# Altium PCB Emitter.PcbDoc
Units mm, origin at the board's own origin, x right, y up, seen from the top; angles counter-clockwise.
Board outline 35.56 x 22.86 mm, 2 copper layers (Top Layer, Bottom Layer), stack 1.58 mm thick; 41 components, 23 nets, 112 pads, 20 vias.
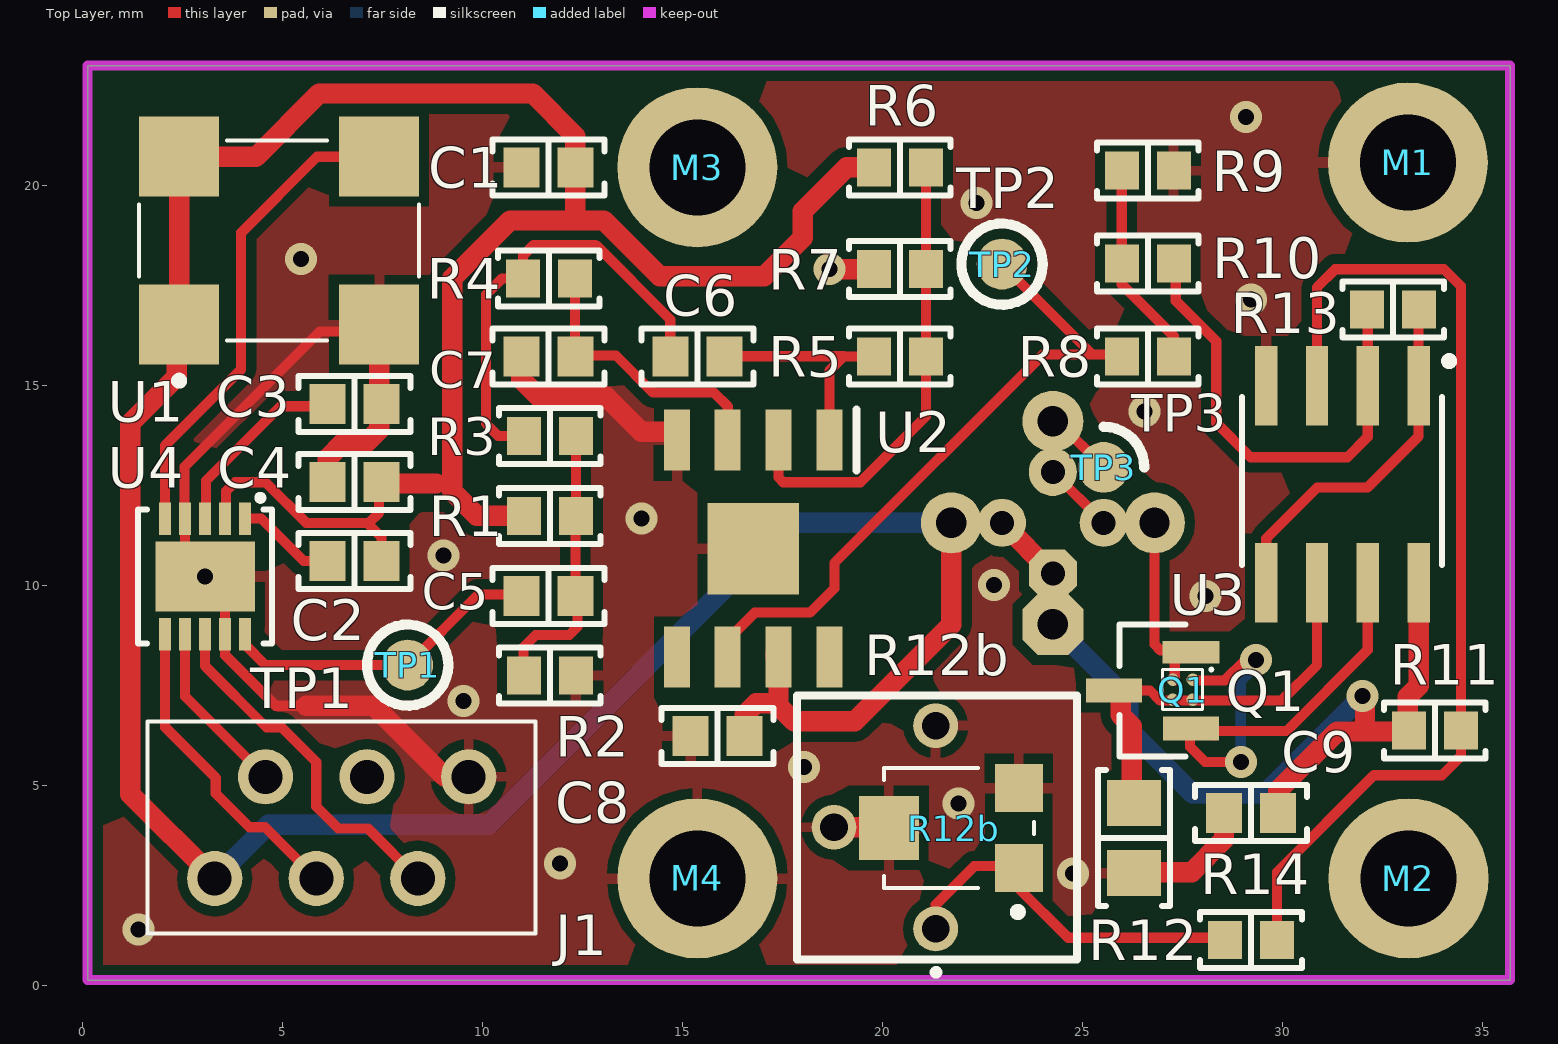
[diagram p0: Top Layer view]
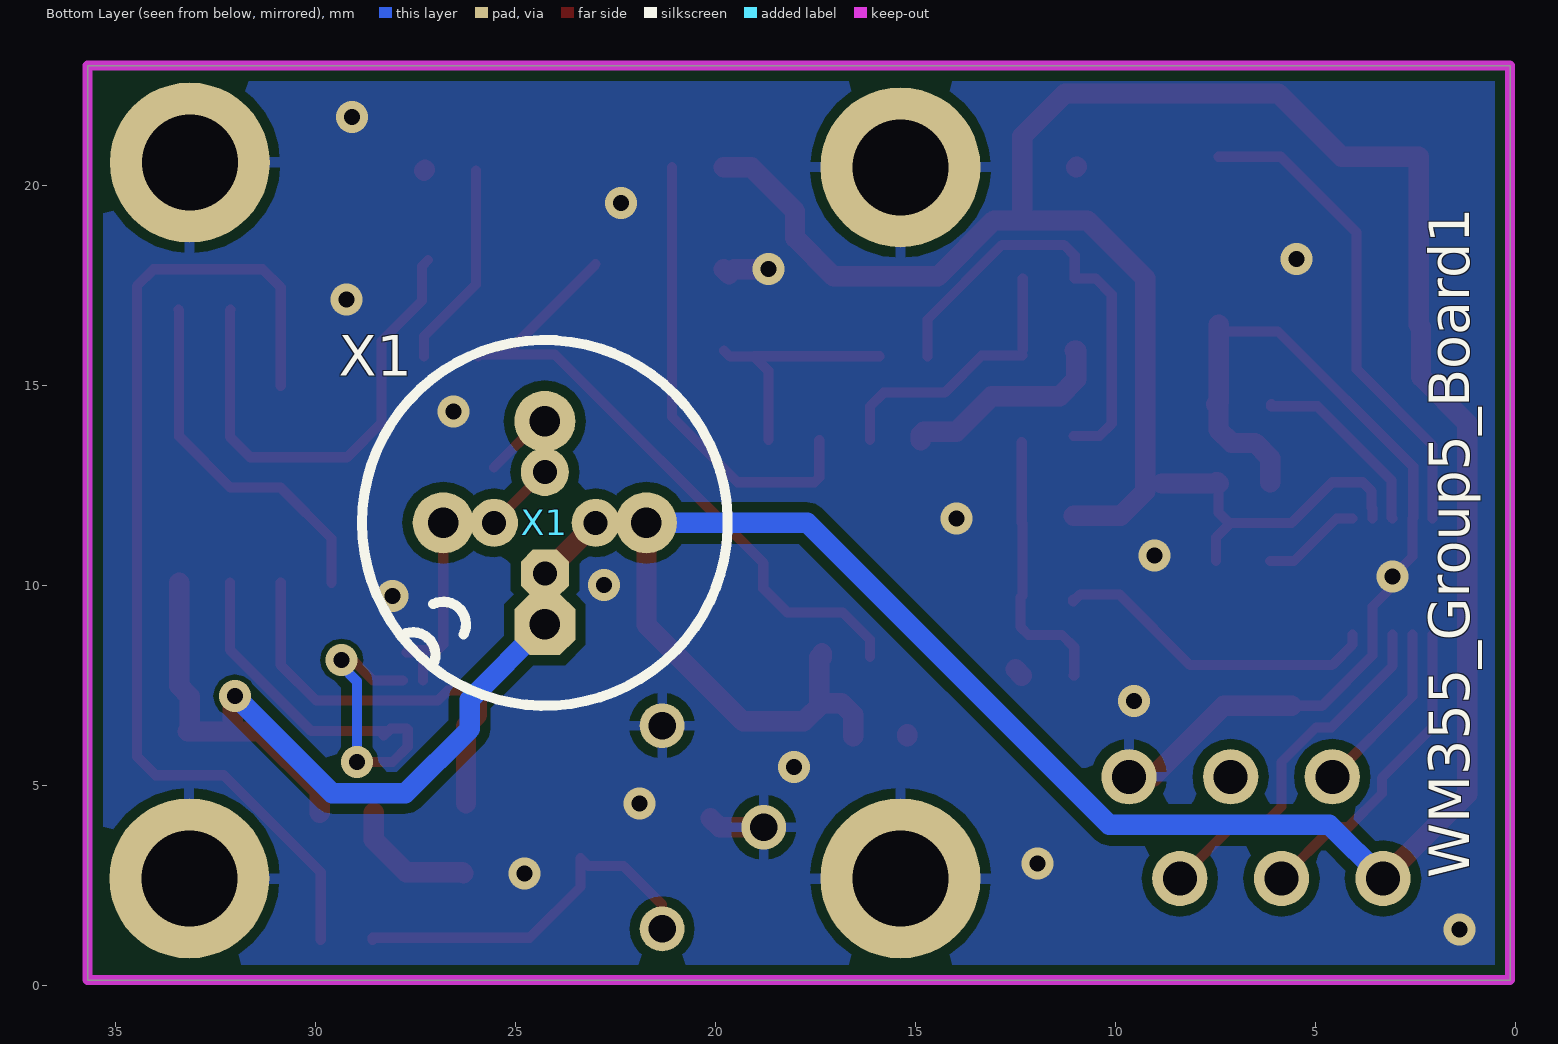
[diagram p1: Bottom Layer view, seen from below]
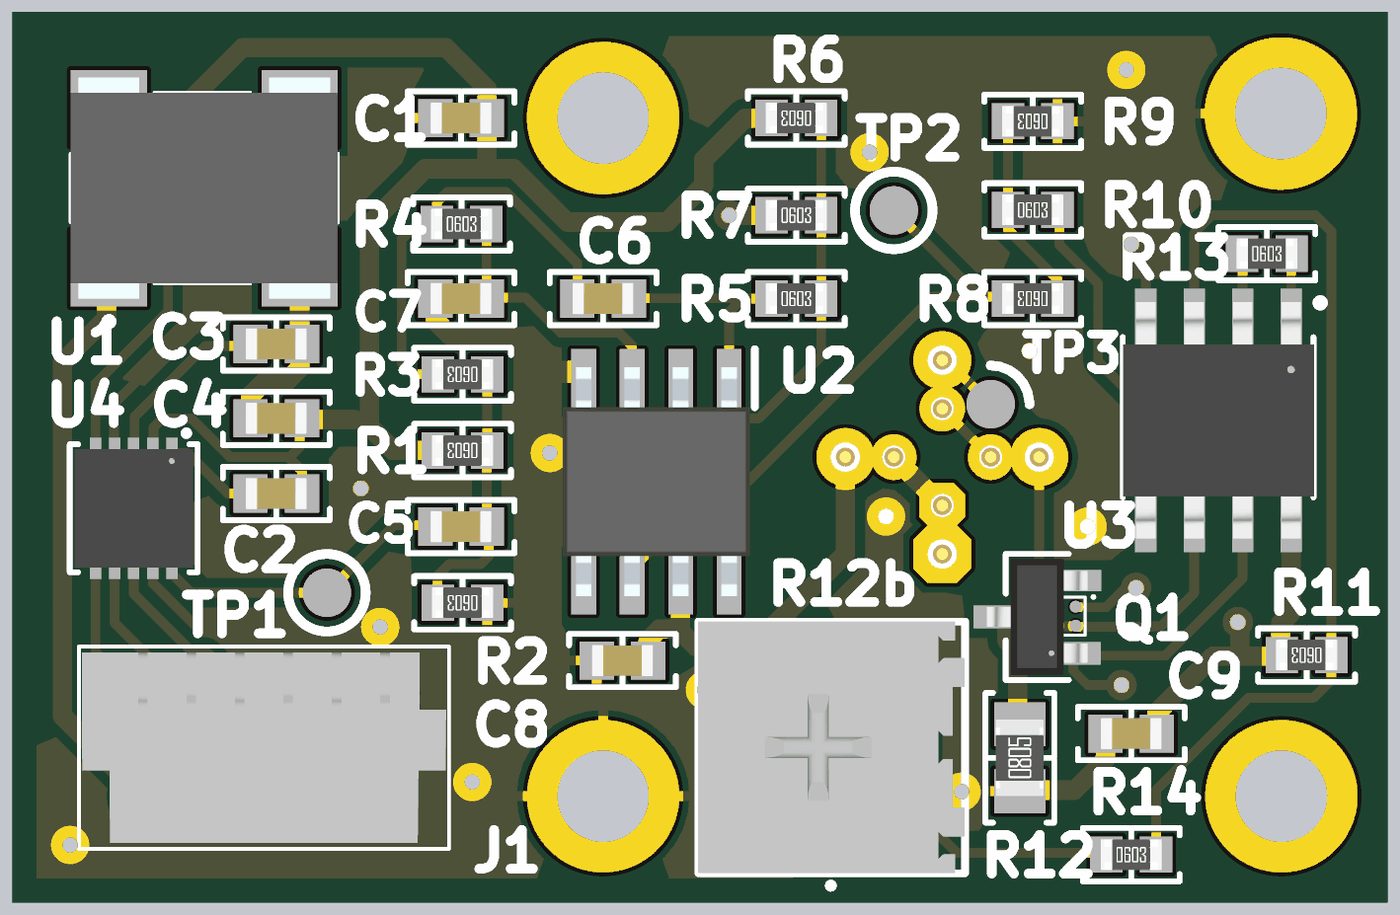
[diagram p2: 3D render of the assembled board from above, using the file's embedded part models]

## Layer stack, top to bottom
Top Solder: solder mask 0.0102, Solder Resist, Dk 3.5
Top Layer: signal copper 0.0356
Dielectric 1: dielectric 1.509, FR-4, Dk 4.8
Bottom Layer: signal copper 0.0356
Bottom Solder: solder mask 0.0102, Solder Resist, Dk 3.5

## Board outline
35.687,22.987 35.687,0.127 0.127,0.127 0.127,22.987

## Design rules (kind name [scope] priority, off if disabled: settings)
Clearance [All] p1: gap=0.127 ignorepadtopadclearanceinfootprint=FALSE except(0.254: Arc-Fill Arc-Poly Arc-Region Track-Fill Track-Poly Track-Region SMDPad-Fill SMDPad-Poly SMDPad-Region THPad-Fill THPad-Poly THPad-Region)
MinimumSolderMaskSliver [All] p1: minsoldermaskwidth=0.064
PolygonConnect PolygonConnect_1 [IsVia AND InNet('GND')] p1: connectstyle=Direct reliefconductorwidth=0.254 reliefentries=4 polygonreliefangle="90 Angle" airgapwidth=0.254
PolygonConnect [All] p2: connectstyle=Relief reliefconductorwidth=0.254 reliefentries=4 polygonreliefangle="90 Angle" airgapwidth=0.254
RoutingVias [All] p1: holewidth=0.711 width=1.27 viastyle="Through Hole" minholewidth=0.711 minwidth=1.27 maxholewidth=0.711 maxwidth=1.27
SilkToSilkClearance [All] p1: silktosilkclearance=0.003
SilkToSolderMaskClearance [IsPad] p1: minsilkscreentomaskgap=0.051 clearancetoexposedcopper=TRUE
SolderMaskExpansion [All] p1: expansion=0.102 istentingtop=FALSE
Width Width_3 [InNet('VCC')] p1: maxlimit=0.508 minlimit=0.254 preferedwidth=0.508
Width Width_2 [InNet('+3.3V')] p2: maxlimit=0.508 minlimit=0.254 preferedwidth=0.508
Width Width_1 [InNet('GND')] p3: maxlimit=0.508 minlimit=0.254 preferedwidth=0.508
Width [All] p4: maxlimit=0.508 minlimit=0.254 preferedwidth=0.254
27 further rules are at their usual default settings.

## Classes and differential pairs
component class Emitter: C1 C2 C3 C4 C5 C6 C7 C8 C9 J1 M1 M2 M3 M4 Q1 R1 R2 R3 R4 R5 R6 R7 R8 R9 R10 R11 R12 R12b R13 R14 TP1 TP2 TP3 U1 U2 U3 U4 X1

## Components (designator, comment, footprint, x,y, rotation, side; value= is the part's Value field where it differs from the comment)
C1 "100nF" "CAP 0603_1608" 11.644,20.447 r0 top
C2 "10nF" "CAP 0603_1608" 6.8,10.602 r0 top
C3 "100nF" "CAP 0603_1608" 6.8,14.523 r180 top
C4 "100nF" "CAP 0603_1608" 6.8,12.573 r0 top
C5 "18pF" "CAP 0603_1608" 11.644,9.735 r0 top
C6 "18pF" "CAP 0603_1608" 15.367,15.714 r0 top
C7 "18pF" "CAP 0603_1608" 11.644,15.714 r0 top
C8 "100nF" "CAP 0603_1608" 15.875,6.223 r0 top
C9 "100nF" "CAP 0603_1608" 29.21,4.309 r0 top
J1 "7-215460-6" 72154606 6.477,3.937 r0 top
M1 "PTH" M2-PTH 33.132,20.565 r180 top
M2 "PTH" M2-PTH 33.147,2.667 r180 top
M3 "PTH" M2-PTH 15.367,20.447 r180 top
M4 "PTH" M2-PTH 15.367,2.667 r180 top
Q1 "Si8472DB-T2-E1" SI8472DB 27.504,7.387 r270 top
Q1 "CPH3456" CPH3456 26.801,7.437 r90 top
R1 "10k" "RES 0603_1608" 11.684,11.731 r180 top
R2 "10k" "RES 0603_1608" 11.684,7.738 r180 top
R3 "1k8" "RES 0603_1608" 11.684,13.727 r180 top
R4 "2.55k" "RES 0603_1608" 11.659,17.67 r0 top
R5 "787R" "RES 0603_1608" 20.432,15.714 r0 top
R6 "1k8" "RES 0603_1608" 20.432,20.447 r180 top
R7 "1k8" "RES 0603_1608" 20.432,17.898 r0 top
R8 "2k" "RES 0603_1608" 26.63,15.714 r180 top
R9 "100k" "RES 0603_1608" 26.63,20.362 r180 top
R10 "51k" "RES 0603_1608" 26.63,18.038 r0 top
R11 "16k" "RES 0603_1608" 33.807,6.367 r180 top
R12 "4.7k" "RES 0603_1608" 29.21,1.134 r0 top
R12b "3362P-1-103LF" 3362P_1 24.856,3.947 r90 top
R12b "TC33X-1-103E" TC33X2201E 21.78,3.928 r90 top
R13 "43k" "RES 0603_1608" 32.766,16.891 r0 top
R14 "4.7R" "RES 0805_2012" 26.289,3.674 r90 top
TP1 "Generated waveform" TP-SMD-50mil 8.128,8.001 r90 top
TP2 "Op-amp output" TP-SMD-50mil 22.987,18.025 r90 top
TP3 "Signal out" TP-SMD-50mil 25.527,12.945 r90 top
U1 "XO91050UITA" XO91050UITA24576 4.913,18.61 r0 top
U2 "AD8045ARDZ_1" SOIC127P600X175-9N 16.764,10.913 r270 top
U3 "AD8529ARZ" AD8529ARZ 31.164,12.601 r270 top
U4 "AD9837ACPZ-RL7" AD9837ACPZ-RL7 1.124,12.017 r270 top
X1 "TF-184" TF-184 24.257,11.557 r0 bottom
X1 "TF-54" TF-54 24.258,11.557 r0 bottom

## Footprints (in the part's own frame and the unit in brackets; to place one, negate y for a bottom-side part, rotate by r counter-clockwise, add the part's x,y. Pads: shape width x height; smd on the part's side, far side on the other; paste and mask are expansions set on the pad)
3362P_1 [mm]
  round 1.12 hole 0.69: 1(-2.54,3.53) 2(0,6.07) 3(2.54,3.53)
  silkscreen extent -3.68,0 3.3,6.99, body extent -3.3,0.01 3.3,7, height 4.65
72154606 [mm]
  round 1.381 hole 0.85: 1(-3.175,-1.27) 2(-1.905,1.27) 3(-0.635,-1.27) 4(0.635,1.27) 5(1.905,-1.27) 6(3.175,1.27)
  silkscreen extent -4.85,-2.65 4.85,2.65, body extent -4.77,-2.5 4.77,2.5, height 5.7
AD8529ARZ [mil] "Op-amp"
  rect 78x22 smd paste+0 mask+0: 1(-93.89,88.07) 2(-93.89,38.07) 3(-93.89,-11.93) 4(-93.89,-61.93) 5(100.11,-61.93) 6(100.11,-11.93) 7(100.11,38.07) 8(100.11,88.07)
  silkscreen extent -122,-86 83,122, body extent -119,-85 125,112, height 69
AD9837ACPZ-RL7 [mm]
  rect 0.813x0.3 smd paste+0 mask+0: 1(0.352,2.94) 2(0.352,2.44) 3(0.352,1.94) 4(0.352,1.44) 5(0.352,0.94) 6(3.248,0.94) 7(3.248,1.44) 8(3.248,1.94) 9(3.248,2.44) 10(3.248,2.94)
  rect 1.753x2.489 smd paste+0 mask+0: 11(1.8,1.94)
  silkscreen extent -0.24,0.26 3.48,3.62, body extent 0.25,0.39 3.35,3.49, height 0.79
"CAP 0603_1608" [mm] "Chip Capacitor, 2-Leads, Body 1.60x0.80mm, IPC Medium Density"
  rect 0.9x1 smd: 1(-0.675,0) 2(0.675,0)
  silkscreen extent -1.4,-0.7 1.4,0.7, body extent -0.8,-0.41 0.8,0.41, height 0.82
CPH3456 [mm]
  rect 0.6x1.4 smd paste+0 mask+0: 1(-1.024,-0.91) 3(-0.071,1.02)
  rect 0.559x1.422 smd paste+0 mask+0: 2(0.881,-0.91)
  silkscreen extent -1.72,-0.77 1.58,0.88, body extent -1.6,-1.27 1.45,1.38, height 1.12
M2-PTH [mm] "M2 Mounting Hole (Plated, Exposed Pad)"
  round 4 hole 2.4: 1(0,0)
"RES 0603_1608" [mm] "Chip Resistor, 2-Leads, Body 1.60x0.80mm, IPC Medium Density"
  rect 0.85x0.95 smd: 1(-0.65,0) 2(0.65,0)
  silkscreen extent -1.27,-0.7 1.27,0.7, body extent -0.8,-0.4 0.8,0.4, height 0.45
"RES 0805_2012" [mm] "Chip Resistor, 2-Leads, Body 2.00x1.25mm, IPC Medium Density"
  rect 1.15x1.35 smd: 1(-0.875,0) 2(0.875,0)
  silkscreen extent -1.7,-0.9 1.7,0.9, body extent -1,-0.62 1,0.63, height 0.6
SI8472DB [mm] "N channel MOSFET"
  round 0.31 smd mask+0.05: 1(-0.25,0.25) 2(-0.25,-0.25) 3(0.25,0.25) 3(0.25,-0.25)
  silkscreen extent -0.54,-0.5 0.5,0.75
SOIC127P600X175-9N [mm]
  rect 1.525x0.65 smd: 1(-2.712,1.905) 2(-2.712,0.635) 3(-2.712,-0.635) 4(-2.712,-1.905) 5(2.712,-1.905) 6(2.712,-0.635) 7(2.712,0.635) 8(2.712,1.905)
  rect 2.29x2.29 smd: 9(0,0)
  silkscreen extent -3.47,2.58 -1.95,2.58, body extent -3,-2.45 3,2.45, height 1.75
TC33X2201E [mm]
  rect 1.2x1.2 smd: 1(-1,-1.625) 3(1,-1.625)
  rect 1.6x1.5 smd: 2(0,1.625)
  silkscreen extent -2.2,-2 1.5,1.75, body extent -1.5,-1.9 1.5,1.9, height 1.2
TF-54 [mil] "TF-54 IC socket from Fischer Elektronik"
  oct 60x60 hole 30: 1(0,100)
  round 60 hole 30: 2(100,0) 3(0,-100) 4(-100,0)
  silkscreen extent -180,-180 180,180, body extent -203,-203 203,203, height 295
TF-184 [mm] "TF-184 IC socket from Fischer Elektronik"
  oct 1.2x1.2 hole 0.6: 1(0,1.27)
  round 1.2 hole 0.6: 2(1.27,0) 3(0,-1.27) 4(-1.27,0)
  silkscreen extent 1.97,1.97 2.79,2.79, body extent -3.65,-3.65 3.65,3.65, height 7.5
TP-SMD-50mil [mm] "50 mil diameter SMD test point"
  round 1.27 smd: 1(0,0)
  silkscreen extent -1.02,-1.02 1.02,1.01
XO91050UITA24576 [mm]
  rect 2x2 smd: 1(-2.5,-2.1) 2(2.5,-2.1) 3(2.5,2.1) 4(-2.5,2.1)
  silkscreen extent -3.5,-3.6 3.5,2.5, body extent -3.5,-2.9 3.5,2.9, height 1.1

## Part data
C1 C2 C3 C4 C5 C6 C7 C8 C9: library part Capacitor, "SMT Capacitor"
J1: "Micro-Match Connector Female 6-Way", Manufacturer_Name="TE Connectivity", Mouser Part Number=571-7-215460-6, Arrow Part Number=7-215460-6, Arrow Price/Stock=https://www.arrow.com/en/products/7-215460-6/te-connectivity, Datasheet Link=https://www.te.com/commerce/DocumentDelivery/DDEController?Action=srchrtrv&DocNm=4-1773457-1_050_Micro_MaTch&DocType=Data+Sheet&DocLang=English&PartCntxt=7-215460-6&DocFormat=pdf, Height=6mm, Manufacturer_Part_Number=7-215460-6, Mouser Price/Stock=https://www.mouser.co.uk/ProductDetail/TE-Connectivity/7-215460-6/?qs=XAKIUOoRPe4W4KMZv%2FpWzg%3D%3D, System=Connector
M1 M2 M3 M4: "Mounting Hole (Plated, Exposed Pad)"
Q1: library part SI8472DB-T2-E1, "N channel MOSFET"
Q1: "N channel MOSFET"
R1 R2 R3 R4 R5 R6 R7 R8 R9 R10 R11 R12 R13 R14: library part Resistor, "SMT Resistor"
R12b: "TH Trim Potentiometer", Arrow Part Number=TC33X-1-103E, Manufacturer_Name=Bourns, Mouser Part Number=652-TC33X-1-103E, Arrow Price/Stock=https://www.arrow.com/en/products/tc33x-1-103e/bourns?region=nac, Datasheet Link=https://www.bourns.com/pdfs/TC33.pdf, Manufacturer_Part_Number=TC33X-1-103E, Mouser Price/Stock=https://www.mouser.co.uk/ProductDetail/Bourns/TC33X-1-103E?qs=4vvWAaIu%2Fq5rtw%252Bjip48Mw%3D%3D
R12b: "SMD Trim Potentiometer", Manufacturer_Name=Bourns, Mouser Part Number=652-TC33X-1-103E, Arrow Part Number=TC33X-1-103E, Arrow Price/Stock=https://www.arrow.com/en/products/tc33x-1-103e/bourns?region=nac, Datasheet Link=https://www.bourns.com/pdfs/TC33.pdf, Manufacturer_Part_Number=TC33X-1-103E, Mouser Price/Stock=https://www.mouser.co.uk/ProductDetail/Bourns/TC33X-1-103E?qs=4vvWAaIu%2Fq5rtw%252Bjip48Mw%3D%3D
TP1 TP2 TP3: library part "Test Point"
U1: library part 16MHZ_XO91050UITA, "16 MHz SMD oscillator", Manufacturer_Name=EUROQUARTZ, Manufacturer_Part_Number="14.7456MHZ XO91050UITA", Datasheet Link=http://www.farnell.com/datasheets/75391.pdf, Height=1mm
U2: library part AD8045ARDZ, "High speed op-amp", Manufacturer_Name="Analog Devices", Mouser Part Number=584-AD8045ARDZ, Arrow Part Number=AD8045ARDZ, Arrow Price/Stock=https://www.arrow.com/en/products/ad8045ardz/analog-devices, Datasheet Link=https://datasheet.datasheetarchive.com/originals/distributors/Datasheets-SFU1/DSASFU10003709.pdf, Height=1.75mm, Manufacturer_Part_Number=AD8045ARDZ, Mouser Price/Stock=https://www.mouser.co.uk/ProductDetail/Analog-Devices/AD8045ARDZ?qs=%2FtpEQrCGXCwHFOdY8Jjrpw%3D%3D
U3: "Op-amp"
U4: "Programmable waveform generator"
X1: "TF-184 Socket from Fischer Elektronik"
X1: "TF-54 Socket from Fischer Elektronik"

## Via types
v1: diameter 0.8, hole 0.4, Top Layer to Bottom Layer, 12 vias
v2: diameter 0.8, hole 0.4, Top Layer to Bottom Layer, tented top, 8 vias

## Nets (pads, with @x,y where several pads share a name; then routed paths per layer and width w, separated by ;. In a path a pad name is that pad's centre, name@x,y a point inside that pad or via, vN(x,y) a via of type N, cw(c..) or ccw(c..) an arc to the next point about the centre after c; other vN are vias at no path point)
FSYNC: J1.5 U4.8 | length 9
  Top Layer w0.254: U4.8 3.064,7.976 4.597,6.443 4.978,6.443 5.842,5.579 5.842,4.466 6.388,3.92 7.129,3.92 J1.5
FVOUT: C5.1 TP1.1 U4.10 | length 8.3
  Top Layer w0.254: U4.10 4.064,8.512 4.575,8.001 TP1.1 9.897,9.77 10.872,9.77 11.049,9.593 C5.1@11.049,9.643
GND: C1.1 C3.1 C4.1 C7.1 C8.1 C9.1 J1.6 M1.1 M2.1 M3.1 M4.1 R2.1 R7.1 R9.1 R12b.2 R12b.3 R14.1 U1.2 U2.4 U2.9 U3.4 U4.4 U4.9 U4.11 | length 35.3
  Top Layer w0.254: 5.588,6.985 4.826,6.985 3.564,8.247 U4.9 3.564,9.467 3.064,9.967 v1(3.064,10.217) 2.564,10.717 U4.4 2.548,11.68 2.548,12.962 5.927,16.341 7.244,16.341 U1.2
  Top Layer w0.508: 5.588,6.985 7.281,6.985 9.059,5.207 J1.6 ; C4.1 6.125,13.177 6.502,13.555 7.087,13.555 7.417,13.885 7.417,14.465 C3.1 7.413,14.585 U1.2 ; C1.1@10.96,20.456 C1.1 ; C7.1@11.016,15.866 10.969,15.866 C7.1 10.969,15.142 11.388,14.723 13.081,14.723 13.97,13.834 14.788,13.834 14.859,13.763 U2.4 ; R2.1 R2.1@12.49,7.894 ; C8.1 C8.1@15.2,6.273 ; v2(18.669,17.898) 19.528,17.898 19.655,17.771 R7.1 ; R12b.2@18.786,3.947 19.89,3.947 R12b.2@20.118,4.175 ; R14.1 26.315,2.825 27.726,2.825 28.535,3.634 C9.1 ; R9.1@27.254,20.387 R9.1
  other v1: 1.397,1.388 24.765,2.785 11.938,3.039 21.895,4.538 18.034,5.452 9.525,7.103 28.067,9.735 22.784,9.999 13.97,11.664 22.352,19.549 29.083,21.708
  other v2: 9.017,10.735 26.543,14.342 29.21,17.136 5.461,18.152
NetC2_1: C2.1 U4.1 | length 2.5
  Top Layer w0.254: U4.1 4.465,11.664 5.527,10.602 C2.1
NetC3_2: C3.2 U4.3 | length 4.8
  Top Layer w0.254: U4.3 3.087,11.687 3.087,12.612 4.948,14.473 6.096,14.473 C3.2@6.096,14.523
NetC5_2: C5.2 R1.1 R2.2 R3.1 | length 6.9
  Top Layer w0.254: R2.2 11.024,7.749 11.024,8.449 11.328,8.754 12.167,8.754 12.37,8.957 12.37,9.684 C5.2 12.319,11.548 12.334,11.563 R3.1@12.334,13.58
NetC6_1: C6.1 R3.2 R4.1 | length 11.5
  Top Layer w0.254: R3.2 10.394,13.727 10.084,14.037 10.084,17.263 10.49,17.67 R4.1 11.009,18.239 11.278,18.508 12.827,18.508 14.692,16.643 C6.1
NetC6_2: C6.2 R5.1 U2.1 | length 6.2
  Top Layer w0.254: C6.2@15.897,15.721 19.032,15.721 ; U2.1 18.669,15.358 19.025,15.714 19.63,15.714 R5.1@19.782,15.866
NetC7_2: C7.2 R4.2 U2.3 | length 7
  Top Layer w0.254: R4.2 12.309,15.877 C7.2@12.319,15.866 ; C7.2@12.319,15.739 13.335,15.739 14.261,14.813 15.785,14.813 16.129,14.469 U2.3
NetQ1_1: Q1.1 U3.7 | length 13.5
  Top Layer w0.254: Q1.1@27.805,7.62 28.554,7.62 29.062,8.128 v2(29.337,8.128) ; Q1.1@28.284,6.241 Q1.1@28.175,6.35 ; v2(28.956,5.579) 28.067,5.579 27.686,5.96 27.686,6.388 27.711,6.414 28.111,6.414 Q1.1@28.175,6.35 ; U3.7 32.131,8.382 30.099,6.35 Q1.1@28.175,6.35
  Bottom Layer w0.254: v2(28.956,5.579) 28.956,7.599 29.337,7.98 v2(29.337,8.128)
NetQ1_2: Q1.2 TP3.1 X1.2 X1.3 | length 11.2
  Top Layer w0.254: X1.3@24.257,14.097 24.257,12.828 25.527,11.557 X1.2@26.798,11.557 ; X1.3@24.258,14.097 24.374,14.097 TP3.1 ; X1.2@26.797,11.556 26.797,8.522 26.946,8.373 27.657,8.373 27.711,8.319 27.33,8.319 27.305,8.293 Q1.2@27.305,7.62
NetQ1_3: Q1.3 R14.2 U3.6 | length 10.4
  Top Layer w0.254: Q1.3@25.781,7.366 26.686,7.366 26.94,7.112 Q1.3@27.305,7.112 ; R14.2@26.229,4.549 R14.2 ; Q1.3@27.305,7.12 Q1.3@27.805,7.12 ; Q1.3@27.805,7.112 29.758,7.112 29.766,7.12 29.98,7.12 30.861,8.001 U3.6
  Top Layer w0.508: Q1.3@25.954,7.193 25.954,6.752 26.229,6.477 R14.2@26.229,4.549
NetR5_2: R5.2 R6.1 R7.2 U2.2 | length 11.6
  Top Layer w0.254: U2.2 17.399,12.691 17.517,12.573 19.44,12.573 21.082,14.215 R5.2 R7.2 R6.1
NetR8_1: R8.1 R9.2 R10.1 | length 5.2
  Top Layer w0.254: R9.2 R10.1 25.98,17.522 27.28,16.222 R8.1
NetR8_2: R8.2 TP2.1 U2.6 | length 16.8
  Top Layer w0.254: U2.6 16.129,8.639 16.803,9.313 18.186,9.313 18.796,9.923 18.796,10.558 24.002,15.764 25.248,15.764 ; TP2.1 25.248,15.764 ; R8.2@25.929,15.714 25.929,15.764 25.248,15.764
NetR10_2: R10.2 R13.1 U3.2 | length 12.1
  Top Layer w0.254: R10.2@27.178,18.127 27.33,17.974 27.33,17.111 28.341,16.1 28.341,14.057 29.199,13.199 31.623,13.199 32.131,13.707 U3.2 32.131,16.876 R13.1
NetR11_1: R11.1 R12.2 U3.3 | length 25.7
  Top Layer w0.254: R12.2 29.86,2.826 32.283,5.249 33.985,5.249 34.457,5.721 R11.1 34.457,17.477 34.036,17.898 31.314,17.898 30.861,17.445 U3.3
NetR12_1: R12.1 R12b.1 | length 9.6
  Top Layer w0.254: R12b.1@21.326,1.407 21.326,2.013 22.288,2.976 23.168,2.976 23.368,3.175 23.368,2.455 24.639,1.184 28.56,1.184 R12.1
NetR13_2: R13.2 U3.1 U3.5 | length 9.2
  Top Layer w0.254: U3.5 29.591,11.167 30.861,12.437 32.116,12.437 33.401,13.722 U3.1 33.401,16.876 R13.2
NetU1_3: U1.3 U4.5 | length 12.2
  Top Layer w0.254: U4.5 2.064,13.494 3.964,15.394 3.964,18.814 5.86,20.71 U1.3
SCLK: J1.2 U4.7 | length 4.4
  Top Layer w0.254: U4.7 2.564,7.215 J1.2
SDATA: J1.3 U4.6 | length 7.9
  Top Layer w0.254: U4.6 2.064,6.445 3.327,5.182 3.327,4.792 4.172,3.947 4.562,3.947 J1.3
VCC: C1.2 C2.2 C4.2 C8.2 C9.2 J1.1 R1.2 R6.2 R11.2 U1.1 U1.4 U2.7 U3.8 U4.2 X1.1 X1.4 | length 118.7
  Top Layer w0.254: U4.2 3.564,11.921 3.587,11.944 3.587,12.35 3.81,12.573 4.572,12.573 5.588,11.557 7.112,11.557 ; C4.2@7.413,12.347 7.413,11.811 7.159,11.557 7.112,11.557 ; C2.2 7.475,11.194 7.112,11.557
  Top Layer w0.508: J1.1 1.194,4.775 1.194,14.047 2.353,15.206 2.353,16.45 U1.1 U1.4 4.336,20.71 5.918,22.292 11.252,22.292 12.319,21.226 C1.2 12.319,19.408 ; C4.2 7.443,12.573 7.413,12.543 8.839,12.543 ; R1.2 9.855,11.731 9.855,11.738 9.246,12.347 9.246,17.67 10.693,19.117 13.03,19.117 14.427,17.72 17.042,17.72 18.001,18.679 18.001,19.349 19.1,20.447 R6.2 ; C8.2 16.55,6.762 16.839,7.051 17.328,7.051 ; U2.7@17.328,8.201 U2.7@17.328,8.272 ; U2.7@17.328,8.297 U2.7@17.328,8.272 ; X1.1@24.257,9.018 24.257,10.287 22.987,11.557 21.718,11.557 21.718,9.009 19.304,6.595 17.784,6.595 17.328,7.051 ; C9.2 29.885,4.857 31.369,6.341 32.06,6.341 ; v2(32.004,7.23) 32.06,7.174 32.06,6.341 ; U3.8 33.401,7.484 33.132,7.215 33.132,6.392 R11.2 33.183,6.341 32.06,6.341 ; 17.328,7.051 17.399,7.122 U2.7 U2.7@17.328,8.272
  Bottom Layer w0.508: J1.1 4.643,4.009 10.148,4.009 17.697,11.557 X1.4@21.718,11.557 ; X1.1@24.258,9.017 26.139,7.136 26.139,6.403 27.744,4.798 29.572,4.798 v2(32.004,7.23)
pads on no net: J1.4 U2.5 U2.8

## Polygon pours and split planes (outlines as drawn)
GND on Bottom Layer "Bottom Layer-No Net" (solid, pour order 6): 0.127,22.987 35.687,22.987 35.687,0.127 0.127,0.127
GND on Top Layer "Top Layer-No Net" (solid, pour order 0): 0.127,22.987 35.687,22.987 35.687,0.127 0.127,0.127

## Keep-outs
Keep-Out Layer:
  the board outline again, w0.254

## Silkscreen, mask and mechanical layers (free items; w line width, h text height)
Bottom Overlay:
  text "WM355_Group5_Board1" at 1.143,2.667 h1.02 r270
Mechanical 16:
  the board outline again, w0.5